# EAGLE board SurgicalPCB_bare (EAGLE 6.3)

Size 152.07 x 88.89 mm. Coordinates in mm from the lower left corner, seen from the top.
Outline: 0,0 152.07,0 152.07,88.89 0,88.89 0,0
Copper layers (1*16): Top 0.035mm / dielectric 1.5mm / Bottom 0.035mm
Design rules "default *": minimum track width 15mil, minimum drill 24mil, track to track 15mil, track to pad 15mil, pad to pad 15mil, via to via 15mil, smd to smd 8mil, copper to edge 20mil, drill to drill 8mil, minimum pad ring 25mil, minimum via ring 25mil, stop-mask expansion 4mil, vias tented up to drill 0mil, thermal gap 10mil
Net classes: 0 default: width 0.381 mm, drill 0.762 mm, clearance 0.381 mm; 1 Power: width 1.016 mm, drill 1.27 mm, clearance 0.381 mm; 2 Motor: width 0.762 mm, drill 1.27 mm, clearance 0.381 mm
Holes 0.6 mm at 12.7,12.7 12.7,76.2 139.7,76.2 139.7,12.7 81.28,38.1

## Footprints (pad centres in the part's own frame; a part is rotated, then mirrored left to right if it is on the bottom)
V_REG = drill 0.8: ADJ 0,0; VIN 0,2.54 | drill 0.8 square: VOUT 0,-2.54
RESISTOR = drill 0.8: VIN 0,1.27 | drill 0.8 square: VOUT 0,-1.27
A4955 = drill 0.8: 1A 6.35,-1.27; 1B 6.35,-3.81; 2A 6.35,1.27; 2B 6.35,3.81; !EN -6.35,8.89; !RST -6.35,-1.27; !SLP -6.35,-3.81; DIT -6.35,-8.89; MS1 -6.35,6.35; MS2 -6.35,3.81; MS3 -6.35,1.27; STEP -6.35,-6.35; VDD 6.35,-6.35; VMOT 6.35,8.89 | drill 0.8 square: GND 6.35,6.35; GND_2 6.35,-8.89
BOARDUINO = drill 0.8: 5V 8.89,-2.54; 5V_2 8.89,-10.16; 10 -8.89,12.7; 11 -8.89,10.16; 12 -8.89,7.62; 13 -8.89,5.08; A0 -8.89,-5.08; A1 -8.89,-7.62; A2 -8.89,-10.16; A3 -8.89,-12.7; A4 -8.89,-15.24; A5 -8.89,-17.78; AREF -8.89,0; D2 8.89,5.08; D3 8.89,7.62; D4 8.89,10.16; D5 8.89,12.7; D6 8.89,15.24; D7 8.89,17.78; D8 -8.89,17.78; D9 -8.89,15.24; GND -8.89,2.54; GND_2 8.89,-5.08; GND_3 8.89,-12.7; RESET 8.89,-17.78; RX 8.89,0; TX 8.89,2.54; VIN 8.89,-15.24
MC33926 = drill 0.8: EN -11.43,-7.62; FB -11.43,-5.08; GND -11.43,12.7; IN1 -11.43,5.08; IN2 -11.43,7.62; INV -11.43,-12.7; JP_EN -8.89,-7.62; JP_INV -8.89,-12.7; JP_PWM/D1 -8.89,0; JP_PWM/D2 -8.89,2.54; JP_SLEW -8.89,-10.16; PWM/D1 -11.43,0; PWN/D2 -11.43,2.54; SF -11.43,-2.54; SLEW -11.43,-10.16; VDD -11.43,10.16; VIN -11.43,15.24 | drill 0.8 square: M_GND 11.43,0; M_OUT1 11.43,-7.01; M_OUT2 11.43,-3.505; M_VIN 11.43,3.505
2_5_RIBBON = drill 0.8 square: 1 -1.27,5.08 | drill 0.8: 2 1.27,5.08; 3 -1.27,2.54; 4 1.27,2.54; 5 -1.27,0; 6 1.27,0; 7 -1.27,-2.54; 8 1.27,-2.54; 9 -1.27,-5.08; 10 1.27,-5.08
PROPE_HOLE = drill 0.8: P$1 0,0

## Placement (x,y rotation side)
6V  V_REG  [V_REG]  113.03,30.48 270 top
10V  V_REG  [V_REG]  113.03,19.05 270 top
E_STOP  RESISTOR  [RESISTOR]  95.25,8.89 0 top
EV  V_REG  [V_REG]  113.03,7.62 270 top
LED_GREEN  RESISTOR  [RESISTOR]  82.55,8.89 180 top
LED_R  RESISTOR  [RESISTOR]  82.55,17.78 180 top
LED_RES  RESISTOR  [RESISTOR]  88.9,17.78 180 top
LED_RES_G  RESISTOR  [RESISTOR]  88.9,8.89 180 top
POWER_SWITCH  RESISTOR  [RESISTOR]  95.25,17.78 0 top
POWERPLUG  RESISTOR  [RESISTOR]  88.9,25.4 90 top
RES6-1  RESISTOR  [RESISTOR]  123.19,33.02 90 top
RES_6-2  RESISTOR  [RESISTOR]  123.19,27.94 90 top
RES_10-1  RESISTOR  [RESISTOR]  123.19,21.59 90 top
RES_10-2  RESISTOR  [RESISTOR]  123.19,16.51 90 top
RES_EV-1  RESISTOR  [RESISTOR]  123.19,10.16 90 top
RES_EV-2  RESISTOR  [RESISTOR]  123.19,5.08 90 top
U$1  A4955  [A4955]  111.76,53.34 90 top
U$2  A4955  [A4955]  135.89,53.34 90 top
U$3  A4955  [A4955]  87.63,53.34 270 top
U$4  BOARDUINOSTD  [BOARDUINO]  63.5,39.37 180 top
U$5  MC33926  [MC33926]  21.59,44.45 90 top
U$6  MC33926  [MC33926]  21.59,72.39 90 top
U$7  MC33926  [MC33926]  21.59,16.51 90 top
U$8  2_5_RIBBON  [2_5_RIBBON]  48.26,81.28 270 top
U$9  2_5_RIBBON  [2_5_RIBBON]  113.03,76.2 270 top
U$10  2_5_RIBBON  [2_5_RIBBON]  86.36,76.2 270 top
U$14  PROPE_HOLE  [PROPE_HOLE]  26.67,10.16 0 top
U$23  PROPE_HOLE  [PROPE_HOLE]  26.67,63.5 0 top
U$24  PROPE_HOLE  [PROPE_HOLE]  26.67,36.83 0 top
U$25  PROPE_HOLE  [PROPE_HOLE]  49.53,31.75 0 top
U$26  PROPE_HOLE  [PROPE_HOLE]  49.53,34.29 0 top

## Library data of the parts
6V 10V E_STOP EV LED_GREEN LED_R LED_RES LED_RES_G POWER_SWITCH POWERPLUG RES6-1 RES_6-2 RES_10-1 RES_10-2 RES_EV-1 RES_EV-2 U$5-U$10 U$14 U$23-U$26 = SURGICALv2
U$1-U$3 = A4955
U$4 = SURGICAL

## Nets
6V_RAIL [Power]: 6V.VOUT RES6-1.VIN U$5.M_VIN U$6.M_VIN
10V_RAIL [Power]: 10V.VOUT RES_10-1.VIN U$1.VMOT U$2.VMOT U$3.VMOT U$4.VIN U$7.M_VIN
24V_1 [Power]: POWER_SWITCH.VIN POWERPLUG.VOUT
24V_2 [Power]: E_STOP.VIN LED_RES.VIN POWER_SWITCH.VOUT
24V_3: LED_R.VIN LED_RES.VOUT
24V_4 [Power]: 6V.VIN 10V.VIN E_STOP.VOUT EV.VIN LED_RES_G.VIN
24V_5: LED_GREEN.VIN LED_RES_G.VOUT
GND [Power]: LED_GREEN.VOUT LED_R.VOUT POWERPLUG.VIN RES_6-2.VOUT RES_10-2.VOUT RES_EV-2.VOUT U$1.GND U$1.GND_2 U$2.GND U$2.GND_2 U$3.GND U$3.GND_2 U$4.GND_3 U$5.GND U$5.IN2 U$5.M_GND U$6.GND U$6.IN2 U$6.M_GND U$7.GND U$7.IN2 U$7.M_GND U$9.2
LOGIC_HIGH_RAIL: U$1.!RST U$1.VDD U$2.!RST U$2.VDD U$3.!RST U$3.VDD U$4.5V_2 U$5.IN1 U$5.VDD U$6.IN1 U$6.VDD U$7.IN1 U$7.VDD U$8.1
N$1: U$3.STEP U$4.12
N$2: U$1.!SLP U$2.!SLP U$3.!SLP U$4.D8
N$3: U$1.DIT U$2.DIT U$3.DIT U$4.D9
N$4: U$1.STEP U$4.10
N$5: U$2.STEP U$4.11
N$6: U$7.FB U$14.P$1
N$7: U$6.FB U$23.P$1
N$9: U$5.JP_PWM/D2 U$5.PWN/D2
N$10: U$5.JP_PWM/D1 U$5.PWM/D1
N$11: U$5.JP_SLEW U$5.SLEW
N$12: U$5.FB U$24.P$1
N$13: U$4.D3 U$25.P$1
N$14: U$6.JP_PWM/D2 U$6.PWN/D2
N$15: U$6.JP_PWM/D1 U$6.PWM/D1
N$16: U$6.JP_SLEW U$6.SLEW
N$17: U$4.D2 U$26.P$1
N$19: U$7.JP_PWM/D2 U$7.PWN/D2
N$20: U$7.JP_PWM/D1 U$7.PWM/D1
N$21: U$7.JP_SLEW U$7.SLEW
N$22: U$4.D7 U$5.INV U$6.INV U$7.INV
N$23 [Motor]: U$5.M_OUT2 U$8.10
N$24: U$4.D6 U$5.EN
N$25: U$4.D5 U$6.EN
N$26: U$4.D4 U$7.EN
N$27 [Motor]: U$5.M_OUT1 U$8.8
N$28 [Motor]: U$6.M_OUT2 U$8.3
N$29 [Motor]: U$6.M_OUT1 U$8.5
N$30 [Motor]: U$7.M_OUT2 U$8.7
N$31 [Motor]: U$7.M_OUT1 U$8.9
N$32: U$4.A2 U$8.6
N$33: U$4.A1 U$8.4
N$34: U$4.A0 U$8.2
N$35 [Motor]: U$3.2B U$10.2
N$36 [Motor]: U$3.2A U$10.4
N$37 [Motor]: U$3.1A U$10.6
N$38 [Motor]: U$3.1B U$10.8
N$39: U$4.A5 U$10.10
N$40 [Motor]: U$2.1B U$10.1
N$41 [Motor]: U$2.1A U$10.3
N$42 [Motor]: U$2.2A U$10.5
N$43 [Motor]: U$2.2B U$10.7
N$44: U$4.A4 U$10.9
N$45 [Motor]: U$1.2B U$9.9
N$46 [Motor]: U$1.2A U$9.7
N$47 [Motor]: U$1.1A U$9.5
N$48 [Motor]: U$1.1B U$9.3
N$49: U$4.A3 U$9.1
N$52: 10V.ADJ RES_10-1.VOUT RES_10-2.VIN
N$60: 6V.ADJ RES6-1.VOUT RES_6-2.VIN
N$64: EV.VOUT RES_EV-1.VIN
N$65: EV.ADJ RES_EV-1.VOUT RES_EV-2.VIN

## Tracks (layer width: path | path; a pad name or v marks a point on that pad's centre or on a via)
6V_RAIL  (3 unrouted)
10V_RAIL  (6 unrouted)
24V_1  (1 unrouted)
24V_2  (2 unrouted)
24V_3  (1 unrouted)
24V_4  (4 unrouted)
24V_5  (1 unrouted)
GND  (22 unrouted)
LOGIC_HIGH_RAIL  (13 unrouted)
N$1  (1 unrouted)
N$2  (3 unrouted)
N$3  (3 unrouted)
N$4  (1 unrouted)
N$5  (1 unrouted)
N$6  (1 unrouted)
N$7  (1 unrouted)
N$9  (1 unrouted)
N$10  (1 unrouted)
N$11  (1 unrouted)
N$12  (1 unrouted)
N$13  (1 unrouted)
N$14  (1 unrouted)
N$15  (1 unrouted)
N$16  (1 unrouted)
N$17  (1 unrouted)
N$19  (1 unrouted)
N$20  (1 unrouted)
N$21  (1 unrouted)
N$22  (3 unrouted)
N$23  (1 unrouted)
N$24  (1 unrouted)
N$25  (1 unrouted)
N$26  (1 unrouted)
N$27  (1 unrouted)
N$28  (1 unrouted)
N$29  (1 unrouted)
N$30  (1 unrouted)
N$31  (1 unrouted)
N$32  (1 unrouted)
N$33  (1 unrouted)
N$34  (1 unrouted)
N$35  (1 unrouted)
N$36  (1 unrouted)
N$37  (1 unrouted)
N$38  (1 unrouted)
N$39  (1 unrouted)
N$40  (1 unrouted)
N$41  (1 unrouted)
N$42  (1 unrouted)
N$43  (1 unrouted)
N$44  (1 unrouted)
N$45  (1 unrouted)
N$46  (1 unrouted)
N$47  (1 unrouted)
N$48  (1 unrouted)
N$49  (1 unrouted)
N$52  (2 unrouted)
N$60  (2 unrouted)
N$64  (1 unrouted)
N$65  (2 unrouted)